# Altium PCB BaseNode.PcbDoc (part 2 of 3)
Units mil, origin at the board's own origin, x right, y up, seen from the top; angles counter-clockwise.
Board outline 2200 x 2870 mil, 2 copper layers (Top Layer, Bottom Layer), stack 65.8 mil thick; 93 components, 79 nets, 344 pads, 79 vias.
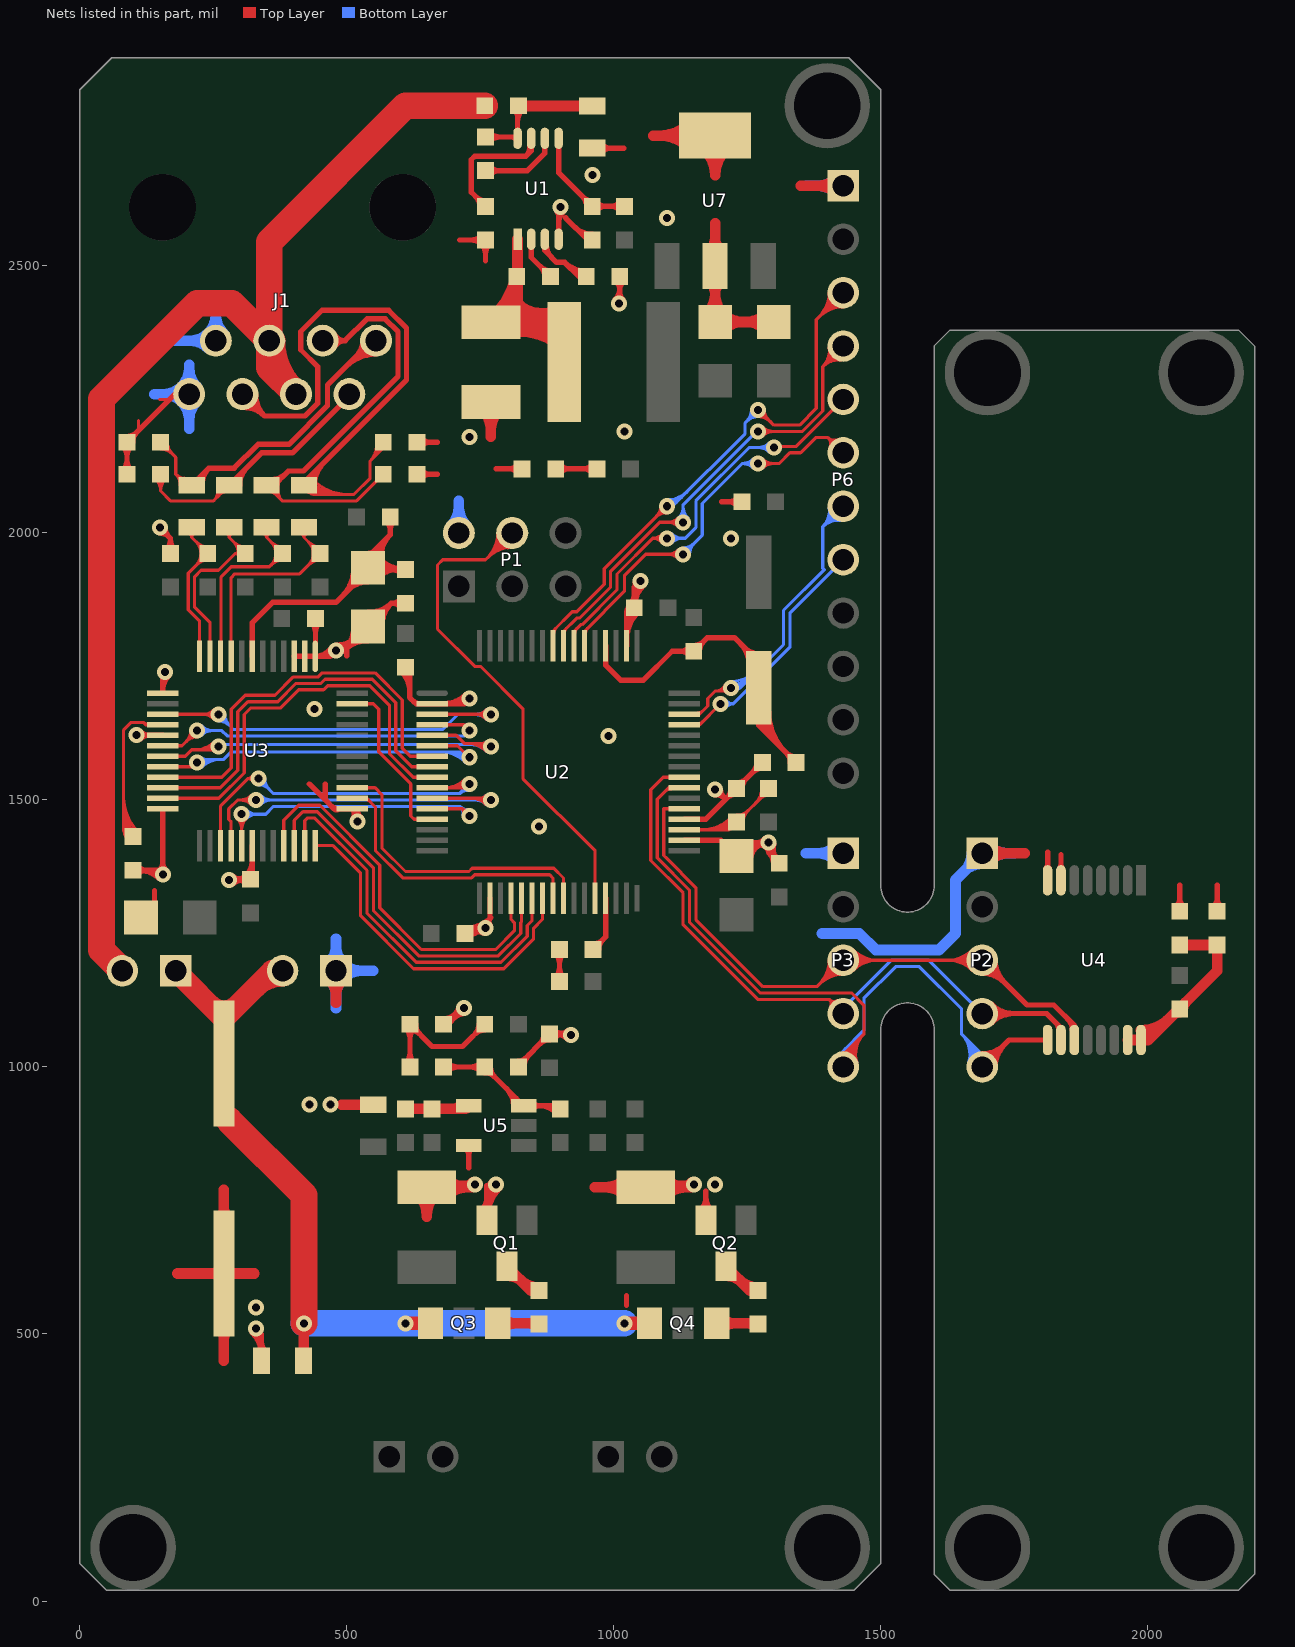
[diagram p2: the nets of this part, all layers, seen from the top]

## Via types
v1: diameter 30, hole 15, Top Layer to Bottom Layer, tented top, 79 vias

## Nets (pads, with @x,y where several pads share a name; then routed paths per layer and width w, separated by ;. In a path a pad name is that pad's centre, name@x,y a point inside that pad or via, vN(x,y) a via of type N, cw(c..) or ccw(c..) an arc to the next point about the centre after c; other vN are vias at no path point) (continued)
GND: C2.1 C3.1 C4.1 C5.1 C6.1 C7.1 C8.1 C9.1 C10.1 C15.1 C16.1 C17.1 C18.1 C19.1 C20.1 C21.1 C22.1 C23.1 C24.1 C25.1 C27.1 C29.1 C30.1 C31.1 D1.A D2.K D4.A D5.A J1.7 J1.8 P1.2 P2.1 P3.1 P6.1 P8.1 Q1.2 Q2.2 R6.1 R12.1 R13.1 R18.1 R21.1 R23.1 R25.1 R26.1 R27.1 U1.4 U2.2 U2.18 U2.34 U2.36 U2.50 U3.1 U3.2 U3.3 U3.13 U3.17 U3.24 U3.30 U3.37 U4.7 U4.8 U5.5 U7.0 U7.2 | length 12111.2
  Top Layer w6: 110,2195 110,2210 ; 150,2250 168.5,2250 170,2250
  Top Layer w10: R23.1@80.9,2117.6 ccw(c62.56,2135.95) 88.5,2135.95 ccw(c114.45,2135.95) R23.1@96.1,2117.6 ; R21.1@80.9,2162.4 cw(c62.56,2144.05) 88.5,2144.05 cw(c114.45,2144.05) R21.1@96.1,2162.4 ; R23.1@88.5,2110 R21.1@88.5,2170 168.5,2250 178.5,2260 J1.8@205,2260 ; R21.1@88.5,2180.75 ccw(c88.5,2206.7) 106.85,2188.35 ccw(c125.2,2170) R21.1@99.25,2170 ; R6.1@100,1368.5 v1@147.17,1368.5 ; R6.1@107.6,1360.9 cw(c125.95,1342.56) 125.95,1368.5 cw(c125.95,1394.45) R6.1@107.6,1376.1 ; R6.1@111,1368.5 cw(c111,1315.33) v1@148.6,1352.93 ; v1@111.26,1621.26 U3.17@155.67,1621.26 ; v1@113.33,1614.19 cw(c130.4,1597.12) 130.4,1621.26 cw(c130.4,1645.4) v1@113.33,1628.33 ; C7.1@114.88,1280 140,1305.12 140,1330 ; 135.14,1368.5 cw(c135.14,1339.47) v1(155.67,1360) U3.24@155.67,1483.46 ; v1@148.6,1367.07 ccw(c131.53,1384.14) 155.67,1384.14 ccw(c179.81,1384.14) v1@162.74,1367.07 ; v1@150,2000 cw(c150,1975.86) 167.07,1992.93 cw(c184.14,2010) v1@160,2010 ; v1(150,2010) 170,1990 C10.1@170,1961.5 ; U3.13@155.67,1700 v1@155.67,1735.67 ; 155.67,1705.4 cw(c194.6,1705.4) v1@167.07,1732.93 ; C10.1@162.4,1969.1 ccw(c144.05,1987.44) 170,1987.44 ccw(c195.95,1987.44) C10.1@177.6,1969.1 ; v1(280,1350) 318.5,1350 C5.1@320,1351.5 322.99,1354.49 U3.30@322.99,1414.57 ; v1@287.07,1342.93 cw(c304.14,1325.86) 304.14,1350 cw(c304.14,1374.14) v1@287.07,1357.07 ; v1@287.22,1356.92 ccw(c297.69,1366.97) 301.45,1352.95 ; v1@288.66,1345 cw(c301.58,1337.54) 297.72,1351.95 ; v1@290.44,1350 ccw(c290.44,1381.06) 312.4,1359.1 ccw(c286.83,1384.67) 322.99,1384.67 ; 297.66,1350 cw(c297.66,1329.16) C5.1@312.4,1343.9 ; v1@322.93,502.93 cw(c280.2,460.2) C30.1@340.63,460.2 ; 322.99,1370.22 ccw(c338.72,1370.22) C5.1@327.6,1359.1 ; v1(330,510) cw(c304.34,484.34) 340.63,484.34 ; C30.1@333.03,466.46 ccw(c314.68,484.81) 340.63,484.81 ccw(c366.58,484.81) C30.1@348.23,466.46 ; C30.1@340.63,450 340.63,499.37 ; U3.3@401.73,1768.9 U3.2@421.42,1768.9 U3.1@441.1,1768.9 ; 430,1530 450.82,1509.18 ; C6.1@433.9,1832.4 cw(c415.55,1814.05) 441.5,1814.05 cw(c467.44,1814.05) C6.1@449.1,1832.4 ; U3.1@441.5,1769.29 C6.1@441.5,1840 ; 454.05,1509.18 450.82,1509.18 ; 459.54,1768.9 ccw(c459.54,1793.31) v1(480,1780) ; 460,1530 460,1500 ; 470.41,1489.59 ccw(c485.39,1504.58) U3.37@485.39,1483.39 ; v1@470.6,1776.58 cw(c463.72,1774.08) 468.9,1768.9 ; v1@471.62,1785.45 cw(c441.1,1805.29) U3.1@441.1,1768.9 ; v1@476.58,1770.6 ccw(c474.08,1763.72) 468.9,1768.9 ; v1@480,1790 ccw(c480,1850.64) C8.1@522.88,1807.76 ; U3.37@485.45,1483.41 cw(c481.02,1487.95) 476.54,1483.46 ; v1@489.2,1776.09 cw(c495.12,1773.57) 495.12,1780 ; v1@489.2,1783.91 ccw(c495.12,1786.43) 495.12,1780 ; 500,1770 500,1784.32 ; 505.81,1790.69 cw(c480,1816.5) v1(480,1780) ; U3.37@510,1483.46 cw(c504.88,1469.32) v1@520,1469.32 ; v1@511.71,1465.6 ccw(c500.03,1473.49) U3.37@510,1483.46 ; C8.1@513.5,1824.74 cw(c450.73,1824.39) 495.12,1780 ; v1@513.7,1467.76 ccw(c502.95,1481) U3.37@520,1481 ; v1(520,1460) v1@520,1473.46 ; C8.1@523.5,1824.79 cw(c484.42,1824.57) 512.06,1796.94 cw(c539.69,1769.31) C8.1@539.91,1808.39 ; v1@526.3,1467.76 cw(c537.05,1481) U3.37@520,1481 ; C8.1@539.85,1798.39 ccw(c539.51,1735.62) 495.12,1780 ; C8.1@540.43,1841.37 ccw(c541.38,1877.82) 567.16,1852.04 ccw(c592.94,1826.26) C8.1@556.49,1825.31 ; C8.1@540.69,1851.37 ccw(c542.21,1909.91) 583.62,1868.5 ; C8.1@566.49,1825.57 cw(c625.03,1827.09) 583.62,1868.5 ; C16.1@602.4,1740.9 cw(c564.74,1703.24) 618,1703.24 ; C9.1@602.4,1860.9 ccw(c584.05,1842.56) 584.05,1868.5 ccw(c584.05,1894.45) C9.1@602.4,1876.1 ; C16.1@609.47,1747.97 cw(c588.88,1727.38) 618,1727.38 ; C9.1@610,1868.5 583.62,1868.5 ; C16.1@618,1740.5 618,1692 629.68,1680.32 U2.2@660,1680.32 720.32,1680.32 v1(730,1690) cw(c706.62,1713.38) 706.62,1680.31 ; 625.78,1684.22 ccw(c635.39,1693.83) U2.2@635.39,1680.24 ; R25.1@631.5,2110 670,2110 ; R27.1@631.5,2170 670,2170 ; R25.1@639.1,2102.4 cw(c657.44,2084.05) 657.44,2110 cw(c657.44,2135.95) R25.1@639.1,2117.6 ; R27.1@639.1,2162.4 cw(c657.44,2144.05) 657.44,2170 cw(c657.44,2195.95) R27.1@639.1,2177.6 ; C27.1@681.5,1080 690,1080 v1(720,1110) ; C27.1@681.5,1080.75 ccw(c681.5,1103.08) 697.29,1087.29 ; C27.1@681.5,1090.75 ccw(c681.5,1137.23) v1@714.36,1104.36 ; U2.2@682.48,1680.31 ccw(c682.48,1737.52) v1@722.93,1697.07 ; C27.1@695.81,1093.65 ccw(c680.21,1120.66) v1@710.34,1112.59 ; 704.44,1098.63 cw(c712.99,1083.83) v1@717.41,1100.34 ; v1@710,1110 cw(c685.86,1110) 702.93,1092.93 cw(c720,1075.86) v1@720,1100 ; 711.5,2548.5 C23.1@760,2548.5 760,2510 ; C18.1@721.54,1250.75 ccw(c723.92,1291.12) v1@752.52,1262.52 ; C18.1@722.13,1260.73 ccw(c725.68,1320.85) 768.27,1278.27 ; U5.5@723.33,847.5 cw(c711.03,835.2) 728.43,835.2 cw(c745.82,835.2) U5.5@733.52,847.5 ; 728.43,811.57 U5.5@728.43,852.6 ; C18.1@730,1250 740,1250 ; C18.1@730.83,1244.68 cw(c740,1239.45) 740,1250 ; C18.1@730.83,1255.32 ccw(c740,1260.55) 740,1250 ; 737.35,1253.77 cw(c744.45,1241.48) v1@753.57,1252.34 ; Q1.2@752.21,731.56 ccw(c727.15,756.63) 762.6,756.63 ccw(c798.05,756.63) Q1.2@772.98,731.56 ; C23.1@752.4,2556.1 cw(c734.05,2574.45) 734.05,2548.5 cw(c734.05,2522.56) 752.4,2540.9 cw(c734.05,2522.56) 760,2522.56 cw(c785.95,2522.56) C23.1@767.6,2540.9 ; v1@754.6,1251.58 ccw(c748.28,1241.72) 740,1250 ; Q1.2@762.6,713.31 762.6,777.4 ; Q1.2@762.6,713.85 cw(c846.15,713.85) v1@787.07,772.93 ; Q1.2@762.6,737.99 cw(c822.01,737.99) v1(780,780) ; 762.6,762.13 cw(c797.87,762.13) v1@772.93,787.07 ; v1@767.71,1266.37 cw(c774.52,1272.01) 768.27,1278.27 ; v1@768.18,1265.76 cw(c776.59,1271.68) 770.36,1279.86 ; U2.18@768.27,1316.14 768.27,1278.27 ; 780,2120 D2.K@828.5,2120 ; D2.K@820.9,2112.4 ccw(c802.56,2094.05) 802.56,2120 ccw(c802.56,2145.95) D2.K@820.9,2127.6 ; R26.1@821.5,1002.99 C25.1@880,1061.5 ; R26.1@821.5,1010.75 ccw(c821.5,1029.47) 834.74,1016.23 ; R26.1@832.24,1000 cw(c865.42,1000) 841.96,1023.46 ; C25.1@869.25,1061.5 cw(c843.3,1061.5) 861.65,1043.15 cw(c880,1024.8) C25.1@880,1050.75 ; C25.1@880,1058.5 C25.1@880,1061.5 ; C25.1@887.6,1053.9 cw(c905.95,1035.55) 905.95,1061.5 cw(c905.95,1087.44) C25.1@887.6,1069.1 ; C25.1@892.25,1061.5 cw(c892.25,1032.25) v1@912.93,1052.93 ; v1@892.93,2602.93 cw(c883.58,2593.58) 896.8,2593.58 ; 896.64,1063.99 ccw(c901.54,1082.27) v1@913.62,1067.7 ; U1.4@896.8,2550 v1@896.8,2606.8 ; 896.8,2578.13 cw(c931.87,2578.13) v1@907.07,2602.93 ; 899.47,1061.5 ccw(c899.47,1080.53) v1@912.93,1067.07 ; 901.22,1062.76 cw(c896.91,1046.67) v1@911.34,1055 ; 901.48,1060.3 cw(c903.56,1052.51) v1@910.9,1055.85 ; 910.11,2590.11 951.72,2548.5 R12.1@960,2548.5 ; v1@918.5,1061.5 C25.1@880,1061.5 ; 927.52,2572.71 ccw(c960,2605.18) R12.1@960,2559.25 ; R12.1@944.59,2555.63 ccw(c960,2571.04) R12.1@960,2549.25 ; C2.1@960,2720.63 1019.37,2720.63 ; C2.1@976.46,2713.03 cw(c994.81,2694.68) 994.81,2720.63 cw(c994.81,2746.58) C2.1@976.46,2728.23 ; v1@1002.93,2437.07 ccw(c982.25,2457.75) 1011.5,2457.75 ; R13.1@1003.9,2472.4 cw(c985.55,2454.05) 1011.5,2454.05 cw(c1037.44,2454.05) R13.1@1019.1,2472.4 ; v1@1011.5,2431.5 R13.1@1011.5,2480 ; 1011.5,2450.53 ccw(c1030.53,2450.53) v1@1017.07,2437.07 ; 1024,554 1024,572 ; U2.50@1024.17,1788.58 1024.17,1845.67 C17.1@1038.5,1860 1038.5,1898.5 ; U2.50@1024.17,1799.45 cw(c1099.05,1799.45) C17.1@1046.1,1852.4 ; 1024.17,1823.6 cw(c1074.91,1823.6) C17.1@1039.03,1859.47 ; C17.1@1024.17,1847.74 cw(c1050.77,1847.74) C17.1@1031.96,1866.54 ; C17.1@1030.9,1867.6 ccw(c1012.56,1885.95) 1038.5,1885.95 ccw(c1064.45,1885.95) C17.1@1046.1,1867.6 ; C17.1@1038.5,1858.7 cw(c1100.47,1858.7) v1@1057.01,1902.87 ; 1038.5,1882.56 cw(c1076.99,1882.56) v1(1050,1910) 1038.5,1898.5 ; v1@1040.5,1906.88 cw(c1032.7,1904.31) 1038.5,1898.5 ; v1@1046.88,1900.5 ccw(c1044.31,1892.7) 1038.5,1898.5 ; U2.34@1132.44,1424.41 1200.71,1424.41 C15.1@1230,1395.12 1254.88,1420 v1(1290,1420) ; U2.36@1132.44,1463.78 1172.28,1463.78 1210,1501.5 ; Q2.2@1162.21,731.56 ccw(c1137.15,756.63) 1172.6,756.63 ccw(c1208.05,756.63) Q2.2@1182.98,731.56 ; Q2.2@1172.6,713.31 1172.6,767.4 ; v1@1190,1510 cw(c1190,1482.25) 1209.63,1501.87 ; v1(1190,1520) 1191.5,1520 1210,1501.5 ; v1@1200,1520 ccw(c1220.53,1520) 1206.01,1505.48 ; 1201.73,2058.27 C21.1@1240.24,2058.27 ; C20.1@1219.25,1521.5 cw(c1193.3,1521.5) 1211.65,1503.15 cw(c1230,1484.8) C20.1@1230,1510.75 ; C15.1@1226.54,1395.66 cw(c1254.97,1391.23) C15.1@1254.97,1420 ; C20.1@1230,1532.24 ccw(c1230,1558.19) 1248.35,1539.84 ccw(c1266.7,1521.5) C20.1@1240.75,1521.5 ; C21.1@1232.64,2050.67 ccw(c1214.29,2032.32) 1214.29,2058.27 ccw(c1214.29,2084.22) C21.1@1232.64,2065.87 ; C15.1@1236.42,1394.12 cw(c1266.64,1389.41) 1266.64,1420 ; C15.1@1246.3,1392.58 cw(c1278.32,1387.59) v1@1278.32,1420 ; C15.1@1256.18,1391.04 cw(c1290,1385.77) v1(1290,1420) ; 1267.18,1417.01 cw(c1271.45,1401.07) v1@1283,1412.86 ; C22.1@1267.76,1570 cw(c1241.81,1570) 1260.16,1551.65 cw(c1278.5,1533.3) C22.1@1278.5,1559.25 ; 1272.95,1418.56 ccw(c1269.37,1431.91) v1@1281.34,1425 ; C22.1@1278.5,1570 C20.1@1230,1521.5 1210,1501.5 ; v1@1280.39,1422.78 cw(c1270.12,1425.75) 1272.89,1415.41 cw(c1275.65,1405.08) v1@1283.07,1412.79 ; v1@1282.93,1412.93 ccw(c1265.86,1395.86) 1265.86,1420 ccw(c1265.86,1444.14) v1@1282.93,1427.07 ; v1@1284.52,1411.63 cw(c1277.88,1401.5) 1290,1401.5 ; v1@1295.48,1411.63 ccw(c1302.12,1401.5) 1290,1401.5 ; C19.1@1297.33,1394.17 cw(c1316.81,1413.65) v1(1290,1420) ; C19.1@1299.25,1381.5 ccw(c1273.3,1381.5) 1291.65,1399.84 ccw(c1310,1418.19) C19.1@1310,1392.24 ; v1@1299.73,1417.7 ccw(c1337.3,1408.8) C19.1@1310,1381.5 1290,1401.5 ; U4.8@1809.67,1371.83 ccw(c1802.84,1378.66) 1812.5,1378.66 ccw(c1822.16,1378.66) U4.8@1815.33,1371.83 ; U4.8@1812.5,1349.5 1812.5,1402.5 ; U4.7@1834.67,1371.83 ccw(c1827.84,1378.66) 1837.5,1378.66 ccw(c1847.16,1378.66) U4.7@1840.33,1371.83 ; U4.7@1837.5,1349.5 1837.5,1397.5 ; C24.1@2052.4,1299.1 ccw(c2034.05,1317.44) 2060,1317.44 ccw(c2085.95,1317.44) C24.1@2067.6,1299.1 ; C24.1@2060,1291.5 2060,1340 ; C31.1@2122.4,1299.1 ccw(c2104.05,1317.44) 2130,1317.44 ccw(c2155.95,1317.44) C31.1@2137.6,1299.1 ; C31.1@2130,1291.5 2130,1340 ; U3.1@441.1,1768.9 468.9,1768.9 ; 450.82,1509.18 460,1500 ; 460,1500 476.54,1483.46 ; 468.9,1768.9 v1(480,1780) ; 476.54,1483.46 U3.37@510,1483.46 ; v1(480,1780) 495.12,1780 ; 495.12,1780 C8.1@540,1824.88 583.62,1868.5 ; U3.37@510,1483.46 v1@520,1473.46 ; v1@520,1473.46 U3.37@520,1481 ; 740,1250 768.27,1278.27 ; 1290,1401.5 v1(1290,1420)
  Top Layer w20: 183.15,613.15 C29.1@270,613.15 ; C29.1@263.15,507.88 cw(c246.62,491.34) 270,491.34 cw(c293.38,491.34) C29.1@276.85,507.88 ; C29.1@263.15,606.3 ccw(c246.62,589.77) 246.62,613.15 ccw(c246.62,636.53) C29.1@263.15,620 ; C29.1@263.15,718.42 ccw(c246.62,734.96) 270,734.96 ccw(c293.38,734.96) C29.1@276.85,718.42 ; 270,450 C29.1@270,613.15 ; 270,770 C29.1@270,613.15 ; C29.1@276.85,606.3 cw(c293.38,589.77) 293.38,613.15 cw(c293.38,636.53) C29.1@276.85,620 ; 326.85,613.15 C29.1@270,613.15 ; P8.1@466.19,1166.19 cw(c432.86,1132.86) 480,1132.86 cw(c527.14,1132.86) P8.1@493.81,1166.19 ; 480,1120 P8.1@480,1180 ; 490.63,929.37 R18.1@550,929.37 ; D4.A@634.8,759.6 cw(c598.1,722.91) 650,722.91 cw(c701.9,722.91) D4.A@665.2,759.6 ; 650,720 D4.A@650,774.8 v1@734.8,774.8 ; D4.A@688.82,759.6 cw(c725.52,722.91) 725.52,774.8 cw(c725.52,826.7) D4.A@688.82,790 ; 714.24,777.82 ccw(c720.29,800.39) v1@736.52,783.59 ; 715.38,774.8 ccw(c715.38,804.62) v1@736.46,783.54 ; D1.A@754.8,2230 cw(c718.1,2193.3) 770,2193.3 cw(c821.9,2193.3) D1.A@785.2,2230 ; 770,2180 D1.A@770,2245.2 ; 964.8,774.8 D5.A@1060,774.8 v1@1144.8,774.8 ; D5.A@1021.18,759.6 ccw(c984.48,722.91) 984.48,774.8 ccw(c984.48,826.7) D5.A@1021.18,790 ; 1074,2744 U7.0@1190,2744 1190,2670 ; D5.A@1098.82,759.6 cw(c1135.52,722.91) 1135.52,774.8 cw(c1135.52,826.7) D5.A@1098.82,790 ; 1124.24,777.82 ccw(c1130.29,800.39) v1@1146.52,783.59 ; 1125.38,774.8 ccw(c1125.38,804.62) v1@1146.46,783.54 ; U7.0@1142.17,2720.67 ccw(c1085.83,2664.33) 1085.83,2744 ccw(c1085.83,2823.67) U7.0@1142.17,2767.33 ; U7.0@1167.95,2719.45 cw(c1123.54,2670) 1190,2670 ; C3.1@1174.8,2410.32 ccw(c1138.1,2447.01) 1190,2447.01 ccw(c1241.9,2447.01) 1205.2,2410.32 ccw(c1241.9,2447.01) 1241.9,2395.12 ccw(c1241.9,2343.22) C3.1@1205.2,2379.92 ; U7.2@1180.45,2470.95 cw(c1157.41,2447.91) 1190,2447.91 cw(c1222.59,2447.91) U7.2@1199.55,2470.95 ; U7.2@1180.45,2529.05 ccw(c1157.41,2552.09) 1190,2552.09 ccw(c1222.59,2552.09) U7.2@1199.55,2529.05 ; 1190,2580 U7.2@1190,2500 C3.1@1190,2395.12 C4.1@1300,2395.12 ; U7.0@1212.05,2719.45 ccw(c1256.46,2670) 1190,2670 ; C4.1@1284.8,2379.92 ccw(c1248.1,2343.22) 1248.1,2395.12 ccw(c1248.1,2447.01) C4.1@1284.8,2410.32 ; 1350,2650 P6.1@1430,2650 ; P6.1@1416.19,2636.19 ccw(c1382.86,2602.86) 1382.86,2650 ccw(c1382.86,2697.14) P6.1@1416.19,2663.81 ; P2.1@1690,1400 1770,1400 ; P2.1@1703.81,1386.19 cw(c1737.14,1352.86) 1737.14,1400 cw(c1737.14,1447.14) P2.1@1703.81,1413.81 ; 725.7,774.85 ccw(c721.46,790.71) 735.67,782.5 cw(c721.46,790.71) 725.7,774.85 ; 1135.7,774.85 ccw(c1131.46,790.71) 1145.67,782.5 cw(c1131.46,790.71) 1135.7,774.85
  Bottom Layer w20: 140,2260 J1.8@205,2260 ; 180,2360 J1.7@255,2360 255,2425 ; 205,2195 J1.8@205,2260 ; 205,2315 J1.8@205,2260 ; J1.8@219.14,2245.86 ccw(c253.28,2211.72) 205,2211.72 ccw(c156.72,2211.72) 190.86,2245.86 ccw(c156.72,2211.72) 156.72,2260 ccw(c156.72,2308.28) 190.86,2274.14 ccw(c156.72,2308.28) 205,2308.28 ccw(c253.28,2308.28) J1.8@219.14,2274.14 ; J1.7@240.86,2345.86 ccw(c206.72,2311.72) 206.72,2360 ccw(c206.72,2408.28) 240.86,2374.14 ccw(c206.72,2408.28) 255,2408.28 ccw(c303.28,2408.28) J1.7@269.14,2374.14 ; P8.1@466.19,1166.19 cw(c432.86,1132.86) 480,1132.86 cw(c527.14,1132.86) 493.81,1166.19 cw(c527.14,1132.86) 527.14,1180 cw(c527.14,1227.14) 493.81,1193.81 cw(c527.14,1227.14) 480,1227.14 cw(c432.86,1227.14) P8.1@466.19,1193.81 ; 480,1110 P8.1@480,1180 ; 480,1240 P8.1@480,1180 ; 550,1180 P8.1@480,1180 ; P1.2@695.86,2014.14 ccw(c661.72,2048.28) 710,2048.28 ccw(c758.28,2048.28) P1.2@724.14,2014.14 ; P1.2@710,2000 710,2060 ; 1360,1400 P3.1@1430,1400 ; 1360,2650 P6.1@1430,2650 ; 1390,1250 1460,1250 1491,1219 1609,1219 1640,1250 1640,1350 P2.1@1690,1400 1750,1400 ; P3.1@1416.19,1386.19 ccw(c1382.86,1352.86) 1382.86,1400 ccw(c1382.86,1447.14) P3.1@1416.19,1413.81 ; P6.1@1416.19,2636.19 ccw(c1382.86,2602.86) 1382.86,2650 ccw(c1382.86,2697.14) P6.1@1416.19,2663.81 ; P2.1@1670.47,1400 cw(c1623.33,1400) 1656.66,1366.66 cw(c1690,1333.33) P2.1@1690,1380.47 ; P2.1@1703.81,1386.19 cw(c1737.14,1352.86) 1737.14,1400 cw(c1737.14,1447.14) P2.1@1703.81,1413.81
  other v1: 330,550 740,780 1150,780 1190,780 430,930 470,930 920,1060 760,1260 860,1450 990,1620 106.26,1621.26 440,1670 160,1740 1220,1990 730,2180 1020,2190 1010,2430 1100,2590 900,2610 960,2670
I2C_SCL: P6.8 U2.45 | length 507.3
  Top Layer w6: U2.45@1132.44,1640.95 1160.95,1640.95 v1(1200,1680) ; U2.45@1157.05,1642.87 ccw(c1157.05,1656.92) 1166.98,1646.98
  Bottom Layer w6: v1(1200,1680) 1223.94,1680 ; v1@1209.61,1672.82 cw(c1223.94,1662.12) 1223.94,1680 ; v1@1209.61,1687.18 ccw(c1223.94,1697.88) 1223.94,1680 ; P6.8@1430,1950 1330,1850 1330,1786.06 1223.94,1680
I2C_SDA: P6.7 U2.46 | length 960
  Top Layer w6: U2.46@1132.44,1660.63 1160.63,1660.63 1176,1676 1176,1689.94 1190.06,1704 ; U2.46@1157.05,1662.55 ccw(c1157.05,1675.84) 1166.44,1666.44 ; 1200.04,1704 ccw(c1200.04,1720.6) v1@1214.7,1712.81 ; 1205.51,1704 cw(c1205.51,1695.51) v1@1211.51,1701.51 ; v1@1209.4,1715.63 cw(c1190.06,1725.9) 1190.06,1704 ; v1(1220,1710) 1214,1704 1190.06,1704
  Bottom Layer w6: v1@1220,1704 ccw(c1220,1730.49) 1238.73,1711.76 ; v1@1220,1716 ccw(c1220,1771.46) 1259.21,1732.24 ; v1@1220,1722 ccw(c1220,1791.94) 1269.46,1742.49 ; v1@1231.31,1706 cw(c1236.97,1704) 1236.97,1710 ; v1@1231.31,1714 ccw(c1236.97,1716) 1236.97,1710 ; 1248.97,1722 cw(c1220,1750.97) v1(1220,1710) 1236.97,1710 ; P6.7@1403.67,2046.8 cw(c1361.29,2041.66) 1391.47,2011.47 cw(c1421.66,1981.29) P6.7@1426.8,2023.67 ; P6.7@1409.62,2047.53 cw(c1376.83,2043.55) 1400.19,2020.19 cw(c1423.55,1996.83) P6.7@1427.53,2029.62 ; P6.7@1415.58,2048.25 cw(c1392.37,2045.43) 1408.9,2028.9 cw(c1425.43,2012.37) P6.7@1428.25,2035.58 ; P6.7@1430,2050 1391.47,2011.47 1391.47,1934.04 1394.27,1931.24 1318,1854.97 1318,1791.03 1236.97,1710
MAG_PWR: C24.2 C31.2 R14.2 U4.15 U4.16 | length 448.6
  Top Layer w20: U4.15@1962.5,1050.5 U4.16@1987.5,1050.5 2000.5,1050.5 2130,1180 C31.2@2130,1228.5 C24.2@2060,1228.5 ; U4.16@1987.5,1049 ccw(c1987.5,1076.76) 2007.13,1057.13 ; U4.16@1987.5,1069 ccw(c1987.5,1145.05) 2041.27,1091.27 ; R14.2@2047.63,1097.63 cw(c2060,1085.27) R14.2@2060,1102.76 ; R14.2@2065.75,1108.5 cw(c2083.24,1108.5) R14.2@2070.87,1120.87
MCU_LED: D3.K U2.29 | length 146.6
  Top Layer w10: D3.K@961.5,1220 984.8,1243.31 U2.29@984.8,1316.14 ; D3.K@961.5,1230.75 ccw(c961.5,1256.7) 979.84,1238.35 ccw(c998.19,1220) D3.K@972.24,1220
MCU_VDDA: C20.2 R7.2 U2.35 | length 515.1
  Top Layer w6: U2.35@1132.44,1444.09 1215.59,1444.09 C20.2@1230,1458.5 1290,1518.5 R7.2@1290,1521.5 ; 1164.44,1444.09 ccw(c1164.44,1524.07) C20.2@1220.99,1467.52 ; 1178.92,1444.09 ccw(c1178.92,1509.58) C20.2@1225.23,1463.28 ; 1193.41,1444.09 ccw(c1193.41,1495.1) C20.2@1229.47,1459.03 ; 1207.89,1444.09 ccw(c1207.89,1480.61) C20.2@1233.71,1454.79 ; C20.2@1230,1465.25 ccw(c1230,1481.54) 1241.52,1470.02 ccw(c1253.04,1458.5) C20.2@1236.75,1458.5 ; C20.2@1230,1471.25 ccw(c1230,1502.03) 1251.76,1480.27 ccw(c1273.52,1458.5) C20.2@1242.75,1458.5 ; 1266.12,1494.63 ccw(c1239.25,1521.5) R7.2@1277.25,1521.5 ; 1273.35,1501.85 cw(c1290,1485.2) R7.2@1290,1508.75 ; 1276.36,1504.87 ccw(c1259.74,1521.5) R7.2@1283.25,1521.5
MII_MDC: U2.5 U3.19 | length 981.2
  Top Layer w6: U3.19@155.67,1581.89 197.95,1581.89 210.06,1594 254,1594 v1(260,1600) cw(c245.51,1614.49) 245.51,1594 cw(c245.51,1585.51) v1@251.51,1591.51 ; 216.54,1594 ccw(c216.54,1643.46) v1@251.51,1608.49 ; 231.03,1594 ccw(c231.03,1628.97) v1@255.76,1604.24 ; U2.5@660,1621.26 704.8,1621.26 720.06,1606 v1@764,1606 ; 726.54,1606 cw(c726.54,1556.54) v1@761.51,1591.51 ; 741.03,1606 cw(c741.03,1571.03) v1@765.76,1595.76 ; v1@761.51,1608.49 cw(c755.51,1614.49) 755.51,1606 cw(c755.51,1585.51) v1(770,1600)
  Bottom Layer w6: v1(260,1600) 264,1604 766,1604 v1(770,1600) ; 731.37,1604 cw(c731.37,1561.37) v1@761.51,1591.51 ; 745.86,1604 cw(c745.86,1575.86) v1@765.76,1595.76 ; 750.69,1604 ccw(c750.69,1619.31) v1@761.51,1608.49
MII_MDIO: U2.4 U3.18 | length 770.4
  Top Layer w6: U3.18@155.67,1601.57 191.58,1601.57 v1(220,1630) ; v1@208,1630 cw(c179.03,1630) 199.51,1609.51 cw(c220,1589.03) v1@220,1618 ; U2.4@660,1640.95 719.05,1640.95 ; v1@719.67,1636.1 ccw(c716.24,1638.13) 719.06,1640.94 ; v1@723.9,1640.33 cw(c721.87,1643.76) 719.06,1640.94 ; v1(730,1630) 719.05,1640.95
  Bottom Layer w6: v1(220,1630) 266,1630 276,1620 720,1620 v1(730,1630) ; v1@228.49,1621.51 cw(c248.97,1601.03) 248.97,1630 cw(c248.97,1658.97) v1@228.49,1638.49
NetC1_1: C1.1 U1.2 | length 125.6
  Top Layer w10: U1.2@845.6,2550 845.6,2515.9 C1.1@881.5,2480 ; C1.1@870.75,2480 ccw(c844.8,2480) 863.15,2498.35 ccw(c881.5,2516.7) C1.1@881.5,2490.75
NetC1_2: C1.2 D1.K L1.1 U1.1 | length 1125.3
  Top Layer w20: D1.K@778.42,2410 ccw(c678.04,2510.38) 820,2510.38 ; D1.K@784.8,2394.8 820,2430 ; D1.K@789.48,2412.84 cw(c805.57,2342.8) 856.39,2393.61 ; D1.K@792.56,2395.86 ccw(c726.33,2462.1) 820,2462.1 ; D1.K@793.62,2416.3 ccw(c793.62,2446.9) D1.K@815.26,2425.26 ; D1.K@793.96,2393.35 cw(c815.12,2301.25) L1.1@881.93,2368.07 ; D1.K@798.44,2373.85 cw(c824.66,2259.71) L1.1@907.48,2342.52 ; D1.K@813.82,2402.15 cw(c838.77,2411.23) 820,2430 ; C1.2@814.44,2475.94 cw(c801.02,2462.51) 820,2462.51 ; C1.2@814.44,2484.06 ccw(c801.02,2497.49) 820,2497.49 ; U1.1@820,2550 820,2430 ; 838.64,2411.36 ccw(c878.85,2451.57) L1.1@906.75,2402.01 ; 857.28,2392.72 ccw(c892.28,2427.71) L1.1@916.56,2384.58 ; 875.92,2374.08 ccw(c905.71,2403.86) L1.1@926.37,2367.15 ; L1.1@896.94,2419.44 cw(c865.43,2475.42) 820,2430 ; L1.1@907.48,2342.52 820,2430
NetC2_2: C2.2 R8.2 R11.2 U1.8 | length 350
  Top Layer w10: R11.2@760,2741.5 U1.8@817.5,2741.5 ; R11.2@767.6,2733.9 cw(c785.95,2715.55) 785.95,2741.5 cw(c785.95,2767.44) R11.2@767.6,2749.1 ; 806.73,2741.5 cw(c806.73,2725.73) U1.8@817.88,2736.88 ; R8.2@813.9,2792.4 cw(c799.16,2777.66) 820,2777.66 ; U1.8@820,2739 R8.2@820,2798.5 ; 820,2770.44 cw(c851.06,2770.44) R8.2@829.1,2792.4
  Top Layer w20: R8.2@820.87,2799.37 C2.2@960,2799.37
NetC11_2: C11.2 R5.1 U3.9 | length 560.7
  Top Layer w6: U3.9@283.62,1768.9 283.62,1916.35 290.52,1923.25 411.76,1923.25 R5.1@450,1961.5 420,1991.5 ; C11.2@415.09,1998.87 cw(c412.02,1991.5) 420,1991.5 ; C11.2@420,2010.63 420,1991.5 ; C11.2@424.91,1998.87 ccw(c427.98,1991.5) 420,1991.5 ; R5.1@450,1948.75 ccw(c450,1917.97) 428.24,1939.73 ccw(c406.48,1961.5) 437.25,1961.5 ccw(c406.48,1961.5) 428.24,1983.26 ccw(c450,2005.02) R5.1@450,1974.24 ; R5.1@450,1954.75 ccw(c450,1938.46) 438.48,1949.98 ccw(c426.96,1961.5) 443.25,1961.5 ccw(c426.96,1961.5) 438.48,1973.02 ccw(c450,1984.54) R5.1@450,1968.24
NetC12_2: C12.2 R4.1 U3.10 | length 544.1
  Top Layer w6: U3.10@262.58,1794.86 ccw(c257.34,1800.1) 264.75,1800.1 ; U3.10@263.94,1796.39 U3.10@263.94,1768.9 264.75,1769.71 264.75,1917.78 283.72,1936.75 355.25,1936.75 R4.1@380,1961.5 350,1991.5 ; C12.2@345.09,1998.87 cw(c342.02,1991.5) 350,1991.5 ; C12.2@350,2010.63 350,1991.5 ; C12.2@354.91,1998.87 ccw(c357.98,1991.5) 350,1991.5 ; R4.1@380,1948.75 ccw(c380,1917.97) 358.24,1939.73 ccw(c336.48,1961.5) 367.25,1961.5 ccw(c336.48,1961.5) 358.24,1983.26 ccw(c380,2005.02) R4.1@380,1974.24 ; R4.1@380,1954.75 ccw(c380,1938.46) 368.48,1949.98 ccw(c356.96,1961.5) 373.25,1961.5 ccw(c356.96,1961.5) 368.48,1973.02 ccw(c380,1984.54) R4.1@380,1968.24
NetC13_2: C13.2 R3.1 U3.11 | length 445.2
  Top Layer w6: U3.11@244.25,1768.9 244.25,1831.81 215.25,1860.81 215.25,1917.98 227.27,1930 260,1930 291.5,1961.5 ; C13.2@275.09,1998.87 cw(c272.02,1991.5) 280,1991.5 ; C13.2@280,2010.63 280,1991.5 ; C13.2@284.91,1998.87 ccw(c287.98,1991.5) 280,1991.5 ; R3.1@297.25,1961.5 ccw(c266.48,1961.5) 288.24,1983.26 ccw(c310,2005.02) R3.1@310,1974.24 ; R3.1@298.09,1956.95 ccw(c291.5,1954.44) 291.5,1961.5 ; R3.1@298.09,1966.04 cw(c291.5,1968.55) 291.5,1961.5 ; R3.1@303.25,1961.5 ccw(c286.96,1961.5) 298.48,1973.02 ccw(c310,1984.54) R3.1@310,1968.24 ; 280,1991.5 R3.1@310,1961.5 291.5,1961.5
NetC14_2: C14.2 R2.1 U3.12 | length 444.8
  Top Layer w6: C14.2@205.09,1998.87 cw(c202.02,1991.5) 210,1991.5 ; C14.2@210,2010.63 210,1991.5 ; C14.2@214.91,1998.87 ccw(c217.98,1991.5) 210,1991.5 ; U3.12@224.57,1768.9 224.57,1834.52 203.25,1855.84 203.25,1924.75 R2.1@240,1961.5 210,1991.5 ; R2.1@240,1948.75 ccw(c240,1917.97) 218.24,1939.73 ccw(c196.48,1961.5) 227.25,1961.5 ccw(c196.48,1961.5) 218.24,1983.26 ccw(c240,2005.02) R2.1@240,1974.24 ; R2.1@240,1954.75 ccw(c240,1938.46) 228.48,1949.98 ccw(c216.96,1961.5) 233.25,1961.5 ccw(c216.96,1961.5) 228.48,1973.02 ccw(c240,1984.54) R2.1@240,1968.24
NetC23_2: C23.2 U1.7 | length 305.3
  Top Layer w10: C23.2@749.25,2611.5 ccw(c723.3,2611.5) 741.65,2629.84 ccw(c760,2648.19) C23.2@760,2622.24 ; C23.2@760,2611.5 733.25,2638.24 733.25,2698.81 739.7,2705.25 835.25,2705.25 ; U1.7@842.62,2726.64 cw(c817,2723.5) 835.25,2705.25 ; U1.7@845.6,2739 845.6,2715.6 835.25,2705.25
NetC27_2: C27.2 R22.1 R24.2 | length 417.4
  Top Layer w10: R24.2@610.9,1007.6 ccw(c592.56,1025.95) 618.5,1025.95 ccw(c644.45,1025.95) R24.2@626.1,1007.6 ; C27.2@610.9,1072.4 cw(c592.56,1054.05) 618.5,1054.05 cw(c644.45,1054.05) C27.2@626.1,1072.4 ; R24.2@618.5,1000 C27.2@618.5,1080 660,1038.5 717.01,1038.5 R22.1@758.5,1080 ; C27.2@618.5,1069.25 cw(c618.5,1043.3) 636.85,1061.65 cw(c655.2,1080) C27.2@629.25,1080 ; R22.1@747.76,1080 cw(c721.81,1080) 740.16,1061.65 cw(c758.5,1043.3) R22.1@758.5,1069.25
NetD2_A: D2.A R30.1 | length 158.5
  Top Layer w10: D2.A@891.5,2120 R30.1@968.5,2120 ; D2.A@899.1,2112.4 cw(c917.44,2094.05) 917.44,2120 cw(c917.44,2145.95) D2.A@899.1,2127.6 ; R30.1@960.9,2112.4 ccw(c942.56,2094.05) 942.56,2120 ccw(c942.56,2145.95) R30.1@960.9,2127.6
NetD3_A: D3.A R31.1 | length 144.5
  Top Layer w10: R31.1@890.9,1167.6 ccw(c872.56,1185.95) 898.5,1185.95 ccw(c924.45,1185.95) R31.1@906.1,1167.6 ; D3.A@890.9,1212.4 cw(c872.56,1194.05) 898.5,1194.05 cw(c924.45,1194.05) D3.A@906.1,1212.4 ; R31.1@898.5,1160 D3.A@898.5,1220 D3.A@901.5,1220
NetQ1_3: Q1.3 R15.1 | length 151
  Top Layer w20: Q1.3@800,609.13 cw(c800,566.74) 829.98,596.72 ; Q1.3@800,626.69 845.2,581.5 R15.1@860,581.5 ; 824.92,601.78 ccw(c860,636.86) R15.1@860,587.24
NetQ2_3: Q2.3 R16.1 | length 151
  Top Layer w20: Q2.3@1210,609.13 cw(c1210,566.74) 1239.98,596.72 ; Q2.3@1210,626.69 1255.2,581.5 R16.1@1270,581.5 ; 1234.92,601.78 ccw(c1270,636.86) R16.1@1270,587.24
NetQ3_3: Q3.3 R15.2 | length 143.6
  Top Layer w20: Q3.3@782.99,520 R15.2@860,520 ; Q3.3@792.62,510.37 cw(c815.88,487.11) 815.88,520 cw(c815.88,552.89) Q3.3@792.62,529.63 ; 842.51,520 cw(c842.51,501.02) R15.2@855.94,514.44
NetQ4_3: Q4.3 R16.2 | length 143.6
  Top Layer w20: Q4.3@1192.99,520 R16.2@1270,520 ; Q4.3@1202.62,510.37 cw(c1225.88,487.11) 1225.88,520 cw(c1225.88,552.89) Q4.3@1202.62,529.63 ; 1252.51,520 cw(c1252.51,501.02) R16.2@1265.94,514.44
NetR6_2: R6.2 U3.16 | length 579.7
  Top Layer w6: 82.26,1447.16 ccw(c115.66,1447.16) R6.2@92.04,1423.54 ; 82.26,1461.64 ccw(c130.15,1461.64) R6.2@96.29,1427.78 ; 82.26,1476.13 ccw(c144.63,1476.13) R6.2@100.53,1432.03 ; 82.26,1490.62 ccw(c159.12,1490.62) R6.2@104.77,1436.27 ; 82.26,1505.1 ccw(c173.6,1505.1) R6.2@109.01,1440.51 ; R6.2@87.4,1433.46 ccw(c69.31,1436.29) 82.26,1449.24 ; R6.2@98.03,1444.09 cw(c95.21,1462.18) 82.26,1449.24 ; R6.2@100,1431.5 82.26,1449.24 ; U3.16@130.41,1642.75 cw(c126.71,1652.89) 119.08,1645.26 ; U3.16@155.67,1640.95 123.39,1640.95 119.08,1645.26 ; 82.26,1449.24 82.26,1631.2 96.32,1645.26 119.08,1645.26
NetR9_1: R9.1 R12.2 U1.5 | length 336
  Top Layer w10: U1.5@896.8,2739 896.8,2674.7 R12.2@960,2611.5 R9.1@1020,2611.5 ; R12.2@949.25,2611.5 ccw(c923.3,2611.5) 941.65,2629.84 ccw(c960,2648.19) R12.2@960,2622.24 ; R12.2@967.6,2603.9 cw(c985.95,2585.55) 985.95,2611.5 cw(c985.95,2637.44) R12.2@967.6,2619.1 ; R9.1@1012.4,2603.9 ccw(c994.05,2585.55) 994.05,2611.5 ccw(c994.05,2637.44) R9.1@1012.4,2619.1
NetR10_1: R10.1 R28.1 U5.4 | length 140.9
  Top Layer w20: R28.1@610,921.5 R10.1@660,921.5 722.52,921.5 U5.4@728.43,927.4 ; 697.03,921.5 ccw(c697.03,946.98) U5.4@715.06,928.96
NetR11_1: R11.1 U1.6 | length 193.3
  Top Layer w10: R11.1@760,2678.5 838.5,2678.5 871.2,2711.2 U1.6@871.2,2739 ; R11.1@767.6,2670.9 cw(c785.95,2652.56) 785.95,2678.5 cw(c785.95,2704.45) R11.1@767.6,2686.1
NetR13_2: R13.2 U1.3 | length 212.4
  Top Layer w10: U1.3@871.2,2550 871.2,2528.8 893.25,2506.75 908.24,2506.75 ; U1.3@874.2,2538 ccw(c903.65,2538) 882.83,2517.17 ; 924.75,2490.24 ccw(c947.7,2513.19) R13.2@948.49,2480.75 ; R13.2@948.24,2490.74 cw(c946.92,2545.42) 908.25,2506.75 ; R13.2@948.5,2480 934.99,2480 908.24,2506.75
NetR20_2: R20.2 R24.1 R26.2 U5.3 | length 505.4
  Top Layer w10: R24.1@681.5,1000 R26.2@758.5,1000 831.1,927.4 U5.3@831.57,927.4 894.09,927.4 R20.2@900,921.5 ; R24.1@689.1,992.4 cw(c707.44,974.05) 707.44,1000 cw(c707.44,1025.95) R24.1@689.1,1007.6 ; R26.2@750.9,992.4 ccw(c732.56,974.05) 732.56,1000 ccw(c732.56,1025.95) R26.2@750.9,1007.6 ; R26.2@758.5,989.25 cw(c758.5,963.3) 776.85,981.65 cw(c795.2,1000) R26.2@769.25,1000 ; 799.45,959.06 cw(c767.79,927.4) U5.3@812.56,927.4 ; 816.52,941.99 cw(c801.93,927.4) U5.3@822.56,927.4 ; U5.3@848.48,922.31 cw(c860.78,910.01) 860.78,927.4 cw(c860.78,944.8) U5.3@848.48,932.5 ; 859.79,927.4 cw(c859.79,881.29) R20.2@892.4,913.9 ; 883.94,927.4 cw(c883.94,905.43) R20.2@899.47,920.97
PHY_R\S\T\: U2.13 U3.47 | length 321.7
  Top Layer w6: U3.47@510,1680.32 549.68,1680.32 560,1670 560,1590 620,1530 620,1470 626.22,1463.78 U2.13@660,1463.78
PHYCLK: U2.3 U3.15 | length 954.4
  Top Layer w6: U3.15@155.67,1660.63 v1@259.37,1660.63 ; 229.51,1660.63 cw(c229.51,1629.51) v1@251.51,1651.51 ; 232.55,1660.63 ccw(c232.55,1687.45) v1@251.51,1668.49 ; 243.99,1660.63 cw(c243.99,1643.99) v1@255.76,1655.76 ; U2.3@660,1660.63 v1@769.37,1660.63 ; 739.51,1660.63 cw(c739.51,1629.51) v1@761.51,1651.51 ; 742.55,1660.63 ccw(c742.55,1687.45) v1@761.51,1668.49 ; 753.99,1660.63 cw(c753.99,1643.99) v1@765.76,1655.76
  Bottom Layer w6: v1@260,1648 cw(c260,1619.03) 280.49,1639.51 cw(c300.97,1660) v1@272,1660 ; v1(260,1660) 288,1632 680,1632 708,1660 v1(770,1660) ; v1@761.51,1651.51 ccw(c741.03,1631.03) 741.03,1660 ccw(c741.03,1688.97) v1@761.51,1668.49
R\E\S\E\T\: P1.4 U2.28 | length 1156.1
  Top Layer w6: P1.4@783,2000 cw(c717.82,2000) 763.91,1953.91 cw(c810,1907.82) P1.4@810,1973 ; P1.4@789,2000 cw(c738.3,2000) 774.15,1964.15 cw(c810,1928.3) P1.4@810,1979 ; P1.4@795,2000 cw(c758.79,2000) 784.39,1974.39 cw(c810,1948.79) P1.4@810,1985 ; P1.4@810,2000 760,1950 680,1950 670,1940 670,1819.99 739.93,1750.06 750.66,1750.06 830,1670.71 830,1540 965.12,1404.88 U2.28@965.12,1316.14
RXC: U2.11 U3.28 | length 882.7
  Top Layer w6: U3.28@283.62,1414.57 283.62,1459.05 279.31,1463.37 279.31,1483.25 296.06,1500 v1(330,1500) v1@325.81,1495.81 ; v1@321.51,1491.51 ccw(c301.03,1471.03) 301.03,1500 ccw(c301.03,1528.97) v1@321.51,1508.49 ; U2.11@660,1503.15 v1@766.85,1503.15 ; 733.42,1503.15 cw(c733.42,1463.42) v1@761.51,1491.51 ; 747.91,1503.15 cw(c747.91,1477.91) v1@765.76,1495.76 ; 748.63,1503.15 ccw(c748.63,1521.37) v1@761.51,1508.49
  Bottom Layer w6: v1(330,1500) v1(770,1500) ; v1@338.49,1491.51 cw(c358.97,1471.03) 358.97,1500 cw(c358.97,1528.97) v1@338.49,1508.49 ; v1@761.51,1491.51 ccw(c741.03,1471.03) 741.03,1500 ccw(c741.03,1528.97) v1@761.51,1508.49
RXD0: U2.9 U3.23 | length 779.7
  Top Layer w6: U3.23@155.67,1503.15 260.7,1503.15 308,1550.45 308,1660.06 319.94,1672 375.74,1672 410.11,1706.37 456.81,1706.37 464.36,1713.92 543.26,1713.92 580,1677.18 580,1586.97 624.45,1542.52 U2.9@660,1542.52
RXD1: U2.8 U3.22 | length 773.3
  Top Layer w6: U3.22@155.67,1522.83 263.42,1522.83 296,1555.42 296,1665.03 314.97,1684 370.77,1684 405.14,1718.37 451.84,1718.37 459.39,1725.92 548.23,1725.92 592,1682.15 592,1591.94 621.74,1562.2 U2.8@660,1562.2
RXD2: U2.7 U3.21 | length 766.9
  Top Layer w6: U3.21@155.67,1542.52 266.13,1542.52 284,1560.39 284,1670 310,1696 365.8,1696 400.17,1730.37 446.87,1730.37 454.42,1737.92 553.2,1737.92 604,1687.12 604,1596.91 619.02,1581.89 U2.7@660,1581.89
RXD3: U2.6 U3.20 | length 872.6
  Top Layer w6: U3.20@155.67,1562.2 212.21,1562.2 v1(220,1570) ; U2.6@660,1601.57 707.51,1601.57 729.09,1580 v1(730,1580)
  Bottom Layer w6: v1@224.24,1565.76 cw(c248.97,1541.03) 248.97,1576 ; v1@228.49,1561.51 cw(c263.46,1526.54) 263.46,1576 ; v1@228.49,1578.49 ccw(c234.49,1584.49) 234.49,1576 ccw(c234.49,1555.51) v1(220,1570) 226,1576 269.94,1576 283.94,1590 720,1590 v1(730,1580) ccw(c705.86,1555.86) 705.86,1590 ; 676.89,1590 cw(c676.89,1526.89) v1@721.51,1571.51 ; 691.37,1590 cw(c691.37,1541.37) v1@725.76,1575.76
RXDV: U2.10 U3.27 | length 839.4
  Top Layer w6: U3.27@263.94,1414.57 263.94,1488.94 315.31,1540.31 ; v1@323.94,1534.97 ccw(c315.32,1530.68) 315.32,1540.31 ; v1@323.94,1545.66 cw(c315.32,1549.95) 315.32,1540.31 ; v1(334.69,1540.31) 315.31,1540.31 ; U2.10@660,1522.83 v1@722.84,1522.83 ; U2.10@683.73,1522.83 ccw(c683.73,1576.27) v1@721.51,1538.49 ; 698.22,1522.84 ccw(c698.22,1561.78) v1@725.76,1534.24 ; 712.7,1522.83 ccw(c712.7,1547.3) v1(730,1530)
  Bottom Layer w6: v1@334.69,1528.31 cw(c334.69,1499.34) 355.17,1519.83 cw(c375.66,1540.31) v1@346.69,1540.31 ; v1(334.69,1540.31) 363,1512 712,1512 ; v1@718.05,1528.85 cw(c697.15,1526.85) 712,1512 ; v1@728.85,1518.05 ccw(c726.85,1497.15) 712,1512 ; v1(730,1530) 712,1512
RXER: U2.12 U3.29 | length 723.1
  Top Layer w6: v1@294.82,1464.82 cw(c274.34,1444.34) 303.31,1444.34 cw(c332.28,1444.34) v1@311.79,1464.82 ; U3.29@303.31,1414.57 v1(303.31,1473.31) ; U2.12@660,1483.46 716.54,1483.46 ; v1@718.68,1473.99 ccw(c710.1,1477.02) 716.54,1483.46 ; v1@726.01,1481.32 cw(c722.98,1489.9) 716.54,1483.46 ; v1(730,1470) 716.54,1483.46
  Bottom Layer w6: v1(303.31,1473.31) 348.31,1473.31 363,1488 712,1488 ; v1@311.79,1464.82 cw(c332.28,1444.34) 332.28,1473.31 cw(c332.28,1502.28) v1@311.79,1481.79 ; v1@718.05,1471.15 ccw(c697.15,1473.15) 712,1488 ; v1@728.85,1481.95 cw(c726.85,1502.85) 712,1488 ; v1(730,1470) 712,1488
RXM: C11.1 J1.6 R27.2 | length 1687.6
  Top Layer w6: C11.1@420,2089.37 437.37,2072 513.53,2072 543.76,2102.22 543.76,2134.75 ; C11.1@420.9,2081.41 ccw(c443.63,2104.14) 443.63,2072 ; C11.1@425.14,2085.66 ccw(c458.11,2118.63) 458.11,2072 ; C11.1@428.86,2076.62 cw(c428.86,2067.23) C11.1@435.5,2073.87 ; C11.1@429.39,2089.9 ccw(c472.6,2133.11) 472.6,2072 ; C11.1@433.63,2094.14 ccw(c487.08,2147.6) 487.08,2072 ; C11.1@437.87,2098.38 ccw(c501.57,2162.08) 501.57,2072 ; 552.68,2143.67 ccw(c530.28,2166.07) R27.2@561.79,2169.31 ; R27.2@555.82,2168.7 cw(c514.1,2164.41) 543.76,2134.75 ; 561.6,2152.59 ccw(c546.46,2167.73) R27.2@567.76,2169.92 ; R27.2@568.5,2170 568.5,2159.5 543.76,2134.75
  Top Layer w10: J1.6@305,2260 346,2219 ; J1.6@305.43,2245.01 cw(c306.38,2212.18) 329.6,2235.4 cw(c352.82,2258.62) J1.6@319.99,2259.57 ; J1.6@305.72,2235.01 cw(c307.3,2180.3) 346,2219 ; J1.6@329.99,2259.28 ccw(c384.7,2257.7) 346,2219 ; C11.1@420,2089.37 420,2094.39 612,2286.39 612,2383.61 578.61,2417 454.02,2417 414,2376.98 414,2343.02 446,2311.02 446,2243.02 421.98,2219 346,2219 ; C11.1@429.61,2089.37 cw(c464.92,2089.37) 439.95,2114.34 ; C11.1@439.61,2089.37 cw(c499.06,2089.37) 457.02,2131.41
RXP: C12.1 J1.3 R25.2 | length 974.7
  Top Layer w6: C12.1@350,2089.37 379.37,2060 ; C12.1@358.86,2076.62 cw(c358.86,2067.23) C12.1@365.5,2073.87 ; C12.1@365.47,2088.01 ccw(c387.16,2083.53) 371.5,2067.87 ; C12.1@371.34,2086.8 ccw(c400.21,2080.84) 379.37,2060 ; R25.2@568.5,2110 518.5,2060 379.37,2060
  Top Layer w10: C12.1@350,2089.37 C12.1@357,2089.37 ; C12.1@358.86,2100.12 ccw(c358.86,2138.69) 386.14,2111.42 ; C12.1@364.09,2089.37 390.84,2116.12 419.1,2116.12 596,2293.02 596,2376.98 571.98,2401 538.02,2401 497.02,2360 ; C12.1@369.61,2089.37 cw(c382.93,2089.37) C12.1@373.51,2098.79 ; J1.3@455,2360 497.02,2360 ; J1.3@476.97,2348.07 cw(c497.02,2337.19) 497.02,2360 ; J1.3@476.97,2371.93 ccw(c497.02,2382.81) 497.02,2360
SPI_C\S\: P2.3 P3.3 U2.37 U4.11 | length 2016.7
  Top Layer w6: U2.37@1132.44,1483.46 1093.47,1483.46 1093.91,1483.02 1093.91,1396.08 1099.18,1390.8 1154,1336 1154,1276 1279.47,1150.53 1380.53,1150.53 P3.3@1430,1200 ; P3.3@1403.47,1200 cw(c1339.43,1200) 1384.71,1154.71 cw(c1430,1109.43) P3.3@1430,1173.47 ; P3.3@1409.47,1200 cw(c1359.91,1200) 1394.96,1164.96 cw(c1430,1129.91) P3.3@1430,1179.47 ; P3.3@1415.47,1200 cw(c1380.4,1200) 1405.2,1175.2 cw(c1430,1150.4) P3.3@1430,1185.47 ; P3.3@1430,1184 P3.3@1430,1200 ; P3.3@1440.27,1189.73 cw(c1465.07,1164.93) 1465.07,1200 cw(c1465.07,1235.07) P3.3@1440.27,1210.27 ; P3.3@1444.52,1185.48 cw(c1479.56,1150.44) 1479.56,1200 cw(c1479.56,1249.56) P3.3@1444.52,1214.52 ; P3.3@1448.76,1181.24 cw(c1494.04,1135.96) 1494.04,1200 cw(c1494.04,1264.04) P3.3@1448.76,1218.76 ; P2.3@1671.24,1181.24 ccw(c1625.96,1135.96) 1625.96,1200 ccw(c1625.96,1264.04) P2.3@1671.24,1218.76 ; P2.3@1675.48,1185.48 ccw(c1640.44,1150.44) 1640.44,1200 ccw(c1640.44,1249.56) P2.3@1675.48,1214.52 ; P2.3@1679.73,1189.73 ccw(c1654.93,1164.93) 1654.93,1200 ccw(c1654.93,1235.07) P2.3@1679.73,1210.27 ; P2.3@1690,1200 P3.3@1430,1200
  Top Layer w10: P2.3@1690,1175.47 cw(c1690,1116.26) 1731.87,1158.13 cw(c1773.74,1200) P2.3@1714.53,1200 ; P2.3@1690,1185.47 cw(c1690,1150.4) 1714.8,1175.2 cw(c1739.6,1200) P2.3@1704.53,1200 ; P2.3@1690,1200 1774,1116 1824,1116 1862.5,1077.5 U4.11@1862.5,1050.5 ; 1850.37,1089.63 cw(c1830.74,1070) U4.11@1858.5,1070
SPI_C\S\2\_AUX: P6.3 U2.57 | length 1482.3
  Top Layer w6: U2.57@886.38,1788.58 886.38,1816.38 922.49,1852.49 930.93,1852.49 982.19,1903.75 982.19,1933.11 1099.09,2050 v1(1100,2050) ; U2.57@888.3,1813.19 cw(c900.64,1813.19) 891.91,1821.91 ; 1077.96,2028.87 cw(c1100,2006.83) v1@1100,2038 ; 1080.16,2031.07 ccw(c1061.23,2050) v1@1088,2050 ; 1088.2,2039.11 cw(c1100,2027.31) v1@1100,2044 ; v1@1270,2218 cw(c1270,2184.2) 1293.9,2208.1 ; v1@1270,2224 cw(c1270,2204.69) 1283.66,2218.34 ; v1(1270,2230) 1272,2230 1300,2202 1348.06,2202 1379.47,2233.41 1379.47,2399.47 P6.3@1430,2450 ; v1@1282,2230 ccw(c1306.14,2230) 1289.07,2212.93 ; P6.3@1403.47,2450 cw(c1339.43,2450) 1384.71,2404.71 cw(c1430,2359.43) P6.3@1430,2423.47 ; P6.3@1409.47,2450 cw(c1359.91,2450) 1394.96,2414.96 cw(c1430,2379.91) P6.3@1430,2429.47 ; P6.3@1415.47,2450 cw(c1380.4,2450) 1405.2,2425.2 cw(c1430,2400.4) P6.3@1430,2435.47
  Bottom Layer w6: v1@1100,2056 ccw(c1100,2094.63) 1127.31,2067.31 ; v1@1100,2062 ccw(c1100,2115.11) 1137.56,2077.56 ; 1117.07,2057.07 cw(c1100,2074.14) v1(1100,2050) 1110,2050 1246,2186 1246,2206 v1(1270,2230) ; v1@1258,2230 cw(c1229.03,2230) 1249.51,2209.51 cw(c1270,2189.03) v1@1270,2218
SPI_MISO: P2.5 P3.5 U2.39 U4.9 | length 2468.9
  Top Layer w6: 1096.02,1516.02 cw(c1107.83,1504.21) U2.39@1107.83,1520.91 ; U2.39@1132.44,1522.83 1102.84,1522.83 1081.47,1501.46 1081.47,1391.55 1142,1331.02 1142,1271.03 1274.5,1138.53 1445.96,1138.53 1468.53,1115.96 1468.53,1061.47 1430,1022.94 P3.5@1430,1000 ; P3.5@1430,1026.53 ccw(c1430,1035.18) 1436.12,1029.06 ; P3.5@1432.41,1000.75 cw(c1463.44,1010.42) 1440.46,1033.4 ; P3.5@1438.14,1002.54 cw(c1474.13,1013.76) 1447.47,1040.42 ; P3.5@1443.87,1004.32 cw(c1484.83,1017.1) 1454.49,1047.44 ; P3.5@1449.6,1006.11 cw(c1495.53,1020.43) 1461.51,1054.45 ; P3.5@1455.33,1007.9 cw(c1506.23,1023.77) 1468.53,1061.47
  Top Layer w10: P2.5@1690,1000 1740.5,1050.5 U4.9@1812.5,1050.5 ; P2.5@1690,1014.53 ccw(c1690,1049.6) 1714.8,1024.8 ccw(c1739.6,1000) P2.5@1704.53,1000 ; P2.5@1690,1024.53 ccw(c1690,1083.74) 1731.87,1041.87 ccw(c1773.74,1000) P2.5@1714.53,1000 ; U4.9@1809.67,1047.67 ccw(c1802.84,1040.84) 1802.84,1050.5 ccw(c1802.84,1060.16) U4.9@1809.67,1053.33
  Bottom Layer w6: P3.5@1426.73,998.84 cw(c1459.39,1010.39) 1434.89,1034.89 ; P3.5@1426.75,1026.33 ccw(c1426.3,1030) 1430,1030 ; P3.5@1430,1000 1430,1030 ; P3.5@1432.38,1000.84 cw(c1469.33,1013.91) 1441.62,1041.62 ; P3.5@1433.25,1026.33 cw(c1433.7,1030) 1430,1030 ; P3.5@1438.04,1002.84 cw(c1479.26,1017.42) 1448.34,1048.34 ; P3.5@1443.7,1004.84 cw(c1489.2,1020.94) 1455.07,1055.07 ; P3.5@1449.35,1006.84 cw(c1499.14,1024.45) 1461.8,1061.8 ; P3.5@1455.01,1008.85 cw(c1509.08,1027.97) 1468.53,1068.53 ; 1658.49,1054.45 cw(c1624.47,1020.43) P2.5@1670.4,1006.11 ; P2.5@1664.67,1007.9 ccw(c1613.77,1023.77) 1651.47,1061.47 ; 1665.51,1047.44 cw(c1635.17,1017.1) P2.5@1676.13,1004.32 ; 1672.53,1040.42 cw(c1645.87,1013.76) P2.5@1681.86,1002.54 ; 1679.54,1033.4 cw(c1656.56,1010.42) P2.5@1687.59,1000.75 ; 1683.88,1029.06 ccw(c1690,1035.18) P2.5@1690,1026.53 ; P2.5@1690,1000 1690,1022.94 1651.47,1061.47 ; 1430,1030 1468.53,1068.53 1468.53,1128.53 1528,1188 1572,1188 1651.47,1108.53 1651.47,1061.47
SPI_MISO_AUX: P6.5 U2.55 | length 900.8
  Top Layer w6: U2.55@925.75,1788.58 925.75,1816.07 938.16,1828.49 940.87,1828.49 1006.19,1893.81 1006.19,1923.16 1073.03,1990 ; U2.55@927.67,1813.19 cw(c939.27,1813.19) 931.07,1821.39 ; v1@1091.09,1981.97 ccw(c1073.03,1965.69) 1073.03,1990 ; v1@1091.09,1998.03 cw(c1073.03,2014.31) 1073.03,1990 ; v1(1100,1990) 1073.03,1990 ; v1(1300,2160) v1@1302,2162 ; v1@1300,2162 v1@1302,2162 ; P6.5@1430,2250 1342,2162 v1@1302,2162
  Bottom Layer w6: v1(1100,1990) 1133.94,1990 1154,2010.06 1154,2060.06 1253.94,2160 v1(1300,2160) ; v1@1108.49,1981.51 cw(c1128.97,1961.03) 1128.97,1990 cw(c1128.97,2018.97) v1@1108.49,1998.49 ; v1@1291.51,2151.51 ccw(c1271.03,2131.03) 1271.03,2160 ccw(c1271.03,2188.97) v1@1291.51,2168.49
SPI_MOSI_AUX: P6.4 U2.56 | length 1192.1
  Top Layer w6: U2.56@906.06,1788.58 906.06,1816.07 930.47,1840.49 935.9,1840.49 994.19,1898.78 994.19,1928.13 1086.06,2020 v1(1130,2020) ; U2.56@907.98,1813.19 cw(c919.59,1813.19) 911.38,1821.39 ; v1@1121.51,2011.51 ccw(c1101.03,1991.03) 1101.03,2020 ccw(c1101.03,2048.97) v1@1121.51,2028.49 ; v1@1260,2190 v1(1270,2190) 1353.03,2190 1391.47,2228.44 1391.47,2311.47 P6.4@1430,2350 ; v1@1278.49,2181.51 cw(c1298.97,2161.03) 1298.97,2190 cw(c1298.97,2218.97) v1@1278.49,2198.49 ; P6.4@1403.67,2346.8 cw(c1361.29,2341.66) 1391.47,2311.47 cw(c1421.66,2281.29) P6.4@1426.8,2323.67 ; P6.4@1409.62,2347.53 cw(c1376.83,2343.55) 1400.19,2320.19 cw(c1423.55,2296.83) P6.4@1427.53,2329.62 ; P6.4@1415.58,2348.25 cw(c1392.37,2345.43) 1408.9,2328.9 cw(c1425.43,2312.37) P6.4@1428.25,2335.58
  Bottom Layer w6: v1@1121.51,2028.49 ccw(c1101.03,2048.97) 1130,2048.97 ccw(c1158.97,2048.97) v1@1138.49,2028.49 ; v1(1130,2020) 1130,2053.03 v1@1268.49,2191.51
SPI_SCK: P2.4 P3.4 U2.40 U4.10 | length 1444.4
  Top Layer w6: U2.40@1132.44,1542.52 1092.52,1542.52 1069.47,1519.46 1069.47,1386.58 1130,1326.05 1130,1266.06 1269.53,1126.53 1403.47,1126.53 ; P3.4@1406.06,1111.43 ccw(c1394.09,1117.15) 1403.47,1126.53 ; P3.4@1418.57,1123.94 cw(c1412.85,1135.91) 1403.47,1126.53 ; P3.4@1430,1100 1403.47,1126.53
  Top Layer w10: P2.4@1690,1100 1810.78,1100 1837.5,1073.28 U4.10@1837.5,1050.5 ; P2.4@1700.27,1089.73 cw(c1725.07,1064.93) 1725.07,1100 cw(c1725.07,1135.07) P2.4@1700.27,1110.27 ; P2.4@1707.34,1082.66 cw(c1749.21,1040.79) 1749.21,1100 cw(c1749.21,1159.21) P2.4@1707.34,1117.34 ; 1828.35,1082.43 cw(c1815.91,1070) U4.10@1833.5,1070
  Bottom Layer w6: P3.4@1430,1100 1430,1110 1520,1200 1590,1200 P2.4@1690,1100
SPI_SCK_AUX: P6.6 U2.54 | length 988.5
  Top Layer w6: U2.54@945.43,1788.58 945.43,1816.07 1020,1890.64 1020,1920 1060,1960 v1(1130,1960) ; U2.54@947.35,1813.19 cw(c958.96,1813.19) 950.75,1821.39 ; v1@1121.51,1951.51 ccw(c1101.03,1931.03) 1101.03,1960 ccw(c1101.03,1988.97) v1@1121.51,1968.49 ; v1(1270,2130) 1310,2130 1330,2150 1350,2150 1378.49,2178.49 1401.51,2178.49 ; v1@1278.49,2121.51 cw(c1298.97,2101.03) 1298.97,2130 cw(c1298.97,2158.97) v1@1278.49,2138.49 ; P6.6@1405.36,2159.82 ccw(c1389.27,2166.24) 1401.52,2178.48 ; P6.6@1410.93,2157.6 ccw(c1398.48,2162.56) 1407.96,2172.04 ccw(c1417.44,2181.52) P6.6@1422.4,2169.07 ; P6.6@1420.18,2174.64 cw(c1413.76,2190.73) 1401.52,2178.48 ; P6.6@1430,2150 1401.51,2178.49
  Bottom Layer w6: v1(1130,1960) 1166,1996 1166,2055.09 1240.91,2130 v1(1270,2130) ; v1@1130,1972 ccw(c1130,2000.97) 1150.49,1980.49 ccw(c1170.97,1960) v1@1142,1960 ; v1@1261.51,2121.51 ccw(c1241.03,2101.03) 1241.03,2130 ccw(c1241.03,2158.97) v1@1261.51,2138.49
TXC: U2.20 U3.33 | length 728
  Top Layer w6: U3.33@382.05,1414.57 382.05,1462.05 410,1490 450,1490 562,1378 562,1298 640,1220 779.09,1220 814,1254.91 814,1269.94 807.64,1276.3 U2.20@807.64,1316.14
TXD0: U2.22 U3.35 | length 719.2
  Top Layer w6: U3.35@421.42,1414.57 421.42,1461.42 426,1466 440.06,1466 538,1368.06 538,1288.06 630.06,1196 789.03,1196 838,1244.97 838,1264.97 847.01,1273.98 U2.22@847.01,1316.14
TXD1: U2.23 U3.36 | length 657.5
  Top Layer w6: U3.36@441.1,1414.57 474.52,1414.57 526,1363.09 526,1283.09 625.09,1184 794,1184 850,1240 850,1260 866.69,1276.69 U2.23@866.69,1316.14
TXD2: U2.24 U3.38 | length 537.7
  Top Layer w6: U3.38@510,1503.15 537.49,1503.15 554,1486.64 554,1405.09 605.09,1354 734,1354 740,1360 880,1360 886.38,1353.62 U2.24@886.38,1316.14 ; U3.38@534.61,1501.23 cw(c534.61,1489.62) 542.81,1497.83
TXD3: U2.25 U3.39 | length 567.4
  Top Layer w6: U3.39@510,1522.83 553.22,1522.83 566,1510.06 566,1410.06 610.06,1366 729.03,1366 735.03,1372 888,1372 906.06,1353.94 U2.25@906.06,1316.14
TXEN: U2.21 U3.34 | length 721
  Top Layer w6: U3.34@401.73,1414.57 401.73,1461.73 418,1478 445.03,1478 550,1373.03 550,1293.03 635.03,1208 784.06,1208 826,1249.94 826,1269.94 827.32,1271.26 U2.21@827.32,1316.14
TXM: C13.1 J1.2 R23.2 | length 661.9
  Top Layer w6: R23.2@142.48,2100.99 cw(c120.72,2079.22) 151.5,2079.22 cw(c182.27,2079.22) R23.2@160.51,2100.99 ; R23.2@146.72,2105.23 cw(c135.21,2093.71) 151.5,2093.71 cw(c167.79,2093.71) R23.2@156.27,2105.23 ; R23.2@151.5,2110 151.5,2078.5 170,2060 250.63,2060 ; 258.5,2067.87 ccw(c242.84,2083.53) C13.1@264.53,2088.01 ; C13.1@258.66,2086.8 cw(c229.79,2080.84) 250.63,2060 ; C13.1@264.5,2073.87 cw(c271.14,2067.23) C13.1@271.14,2076.62 ; C13.1@280,2089.37 250.63,2060
  Top Layer w10: C13.1@280,2089.37 340.63,2150 398.24,2150 J1.2@505,2256.76 ; C13.1@289.61,2089.37 cw(c312.8,2089.37) 296.4,2105.77 ; C13.1@299.61,2089.37 cw(c346.94,2089.37) 313.47,2122.84
TXP: C14.1 J1.1 R21.2 | length 912.4
  Top Layer w6: R21.2@151.5,2157.25 cw(c151.5,2126.48) 173.26,2148.24 cw(c195.02,2170) R21.2@164.24,2170 ; R21.2@151.5,2163.25 cw(c151.5,2146.96) 163.02,2158.48 cw(c174.54,2170) R21.2@158.24,2170 ; R21.2@151.5,2170 180,2141.5 180,2110 ; C14.1@188.39,2089.48 ccw(c159.74,2089.73) 180,2110 ; C14.1@189.56,2100.44 ccw(c200.06,2110.94) C14.1@200.8,2096.11 ; C14.1@200.5,2102.1 cw(c199.15,2129.15) 180,2110 ; C14.1@210,2089.37 200.63,2089.37 180,2110
  Top Layer w10: C14.1@210,2089.37 241.94,2121.31 ; C14.1@219.61,2089.4 cw(c240.69,2090.22) 225.77,2105.14 ; C14.1@229.6,2089.79 cw(c271.82,2091.43) 241.94,2121.31 ; 498.69,2311.68 cw(c555,2255.37) J1.1@555,2335 ; 515.77,2328.75 cw(c555,2289.51) J1.1@555,2345 ; 517.97,2330.95 ccw(c488.92,2360) J1.1@530,2360 ; J1.1@555,2360 547.02,2360 464,2276.98 464,2238.39 391.61,2166 334,2166 289.32,2121.31 241.94,2121.31
VALVE_PWR: C29.2 C30.2 P7.1 P8.2 Q3.1 Q4.1 | length 1673.6
  Top Layer w20: C30.2@419.37,450 v1@419.37,520
  Top Layer w25: v1(610,520) Q3.1@657.01,520 ; Q3.1@649.14,512.14 ccw(c630.16,493.15) 630.16,520 ccw(c630.16,546.85) Q3.1@649.14,527.86 ; v1(1020,520) Q4.1@1067.01,520 ; Q4.1@1059.14,512.14 ccw(c1040.16,493.15) 1040.16,520 ccw(c1040.16,546.85) Q4.1@1059.14,527.86
  Top Layer w40: P7.1@180,1180 270,1090 360,1180 P8.2@380,1180 ; 244.46,1115.54 ccw(c270,1141.08) 270,1104.96 ccw(c270,1141.08) 295.54,1115.54 ; 329.59,1149.59 cw(c380,1099.19) P8.2@380,1170.47
  Top Layer w50: C29.2@280,900 420,760 v1(420,520)
  Bottom Layer w50: v1(420,520) v1(610,520) v1(1020,520)
VDDA: C8.2 C9.2 R1.2 U3.7 | length 1002.2
  Top Layer w10: U3.7@322.99,1768.9 322.99,1831.54 361.45,1870 480,1870 540,1930 C8.2@540,1935.12 540,1955.12 581.5,1996.61 ; 491.15,1881.15 ccw(c437.18,1935.12) C8.2@513.5,1935.12 ; 503.51,1893.51 cw(c540,1857.01) C8.2@540,1908.62 ; 508.22,1898.22 ccw(c471.32,1935.12) C8.2@523.5,1935.12 ; C8.2@540,1961.61 ccw(c540,1977.3) C8.2@551.09,1966.21 ; C8.2@546.32,1936.62 cw(c582.29,1945.13) 556.15,1971.27 ; C8.2@551.98,1946.46 ccw(c586.76,1979.39) 586.76,1931.5 ; C8.2@556.05,1938.92 cw(c602.78,1949.99) 568.82,1983.94 ; C8.2@558.74,1916.38 cw(c595.22,1879.9) C9.2@595.22,1931.5 ; C8.2@559.24,1953.34 ccw(c610,2001.4) C9.2@610,1931.5 C8.2@563.62,1931.5 ; C8.2@565.78,1941.23 cw(c623.27,1954.84) 581.49,1996.61 ; R1.2@573.9,2022.4 cw(c555.55,2004.05) 581.5,2004.05 cw(c607.44,2004.05) R1.2@589.1,2022.4 ; R1.2@581.5,2030 581.5,1996.61 ; C9.2@602.4,1923.9 ccw(c584.05,1905.55) 584.05,1931.5 ccw(c584.05,1957.44) C9.2@602.4,1939.1
VIN: J1.4 J1.5 P7.2 R8.1 | length 2423.4
  Top Layer w50: P7.2@80,1180 41,1219 41,2251 220,2430 285,2430 J1.5@355,2360 ; J1.5@360,2360 ccw(c492.78,2360) J1.4@398.89,2266.11 ; J1.4@405,2260 355,2310 J1.5@355,2360 ; R8.1@758.5,2800 610,2800 355,2545 J1.5@355,2360
XTAL: C22.2 R29.2 U2.52 X1.1 | length 1029
  Top Layer w10: U2.52@984.8,1788.58 984.8,1752.57 1013.37,1724 1055.13,1724 1109.64,1778.5 R29.2@1150,1778.5 1175.5,1804 1226,1804 1271.73,1758.27 X1.1@1271.73,1710 1271.73,1639.76 ; R29.2@1142.4,1770.9 ccw(c1124.05,1752.56) 1124.05,1778.5 ccw(c1124.05,1804.45) R29.2@1142.4,1786.1 ; R29.2@1150,1789.25 ccw(c1150,1815.2) 1168.35,1796.85 ccw(c1186.7,1778.5) R29.2@1160.75,1778.5 ; 1237.83,1792.17 cw(c1200.93,1755.28) X1.1@1253.11,1755.28 ; 1245.05,1784.95 ccw(c1271.73,1811.63) X1.1@1271.73,1773.9 ; X1.1@1254.9,1775.1 cw(c1235.07,1755.28) X1.1@1263.11,1755.28 ; X1.1@1266.43,1646.87 cw(c1264.32,1639.76) 1271.73,1639.76 ; X1.1@1270.35,1664.72 ccw(c1327.29,1664.72) 1287.03,1624.47 ; X1.1@1277.04,1646.87 ccw(c1279.15,1639.76) 1271.73,1639.76 ; X1.1@1280.35,1664.72 ccw(c1361.43,1664.72) 1304.1,1607.4 ; X1.1@1290.35,1664.72 ccw(c1395.57,1664.72) 1321.17,1590.32 ; C22.2@1330.75,1570 ccw(c1304.8,1570) 1323.15,1588.35 ccw(c1341.5,1606.7) C22.2@1341.5,1580.75 ; C22.2@1341.5,1570 1271.73,1639.76
pads on no net: H1.0 H2.0 H3.0 H4.0 H5.0 H6.0 H7.0 J1.0 P1.3 P1.5 U2.15 U2.16 U2.19 U2.31 U2.32 U2.38 U2.47 U2.48 U2.61 U2.62 U2.63 U2.64 U3.5 U3.6 U3.8 U3.14 U3.26 U3.32 U3.43 U3.44 U3.45 U3.46 U3.48 U4.1 U4.2 U4.3 U4.4 U4.5 U4.6 U4.12 U4.13 U4.14
copper on no net:
  other v1: 1550,1140 1550,1160 1550,1250 1550,1270

## Polygon pours and split planes (outlines as drawn)
no net on Top Solder "Ground clip" (solid): 1120,2780 1120,2890 1260,2890 1260,2780
GND on Bottom Layer "MAG_GND" (solid, pour order 11): 1600,1500 2200,1500 2200,900 1600,900